# EAGLE board PIC32Circuit (EAGLE 7.5.0)
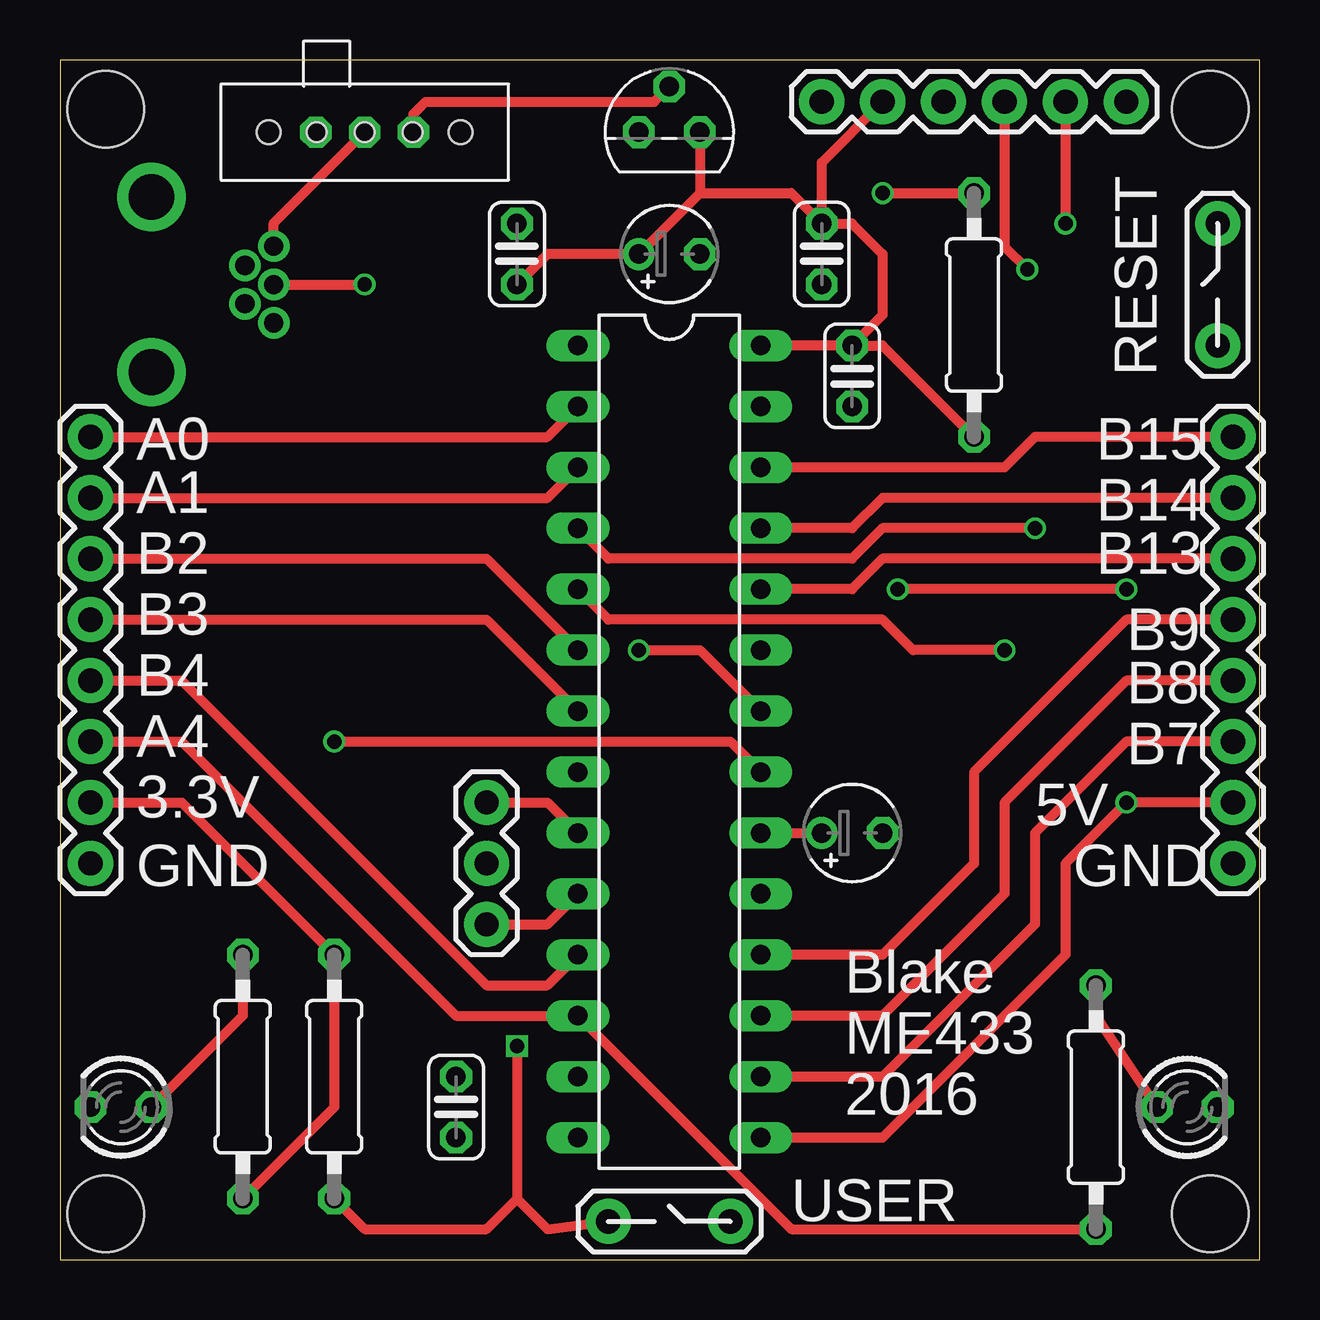
[diagram p0: board, top side]
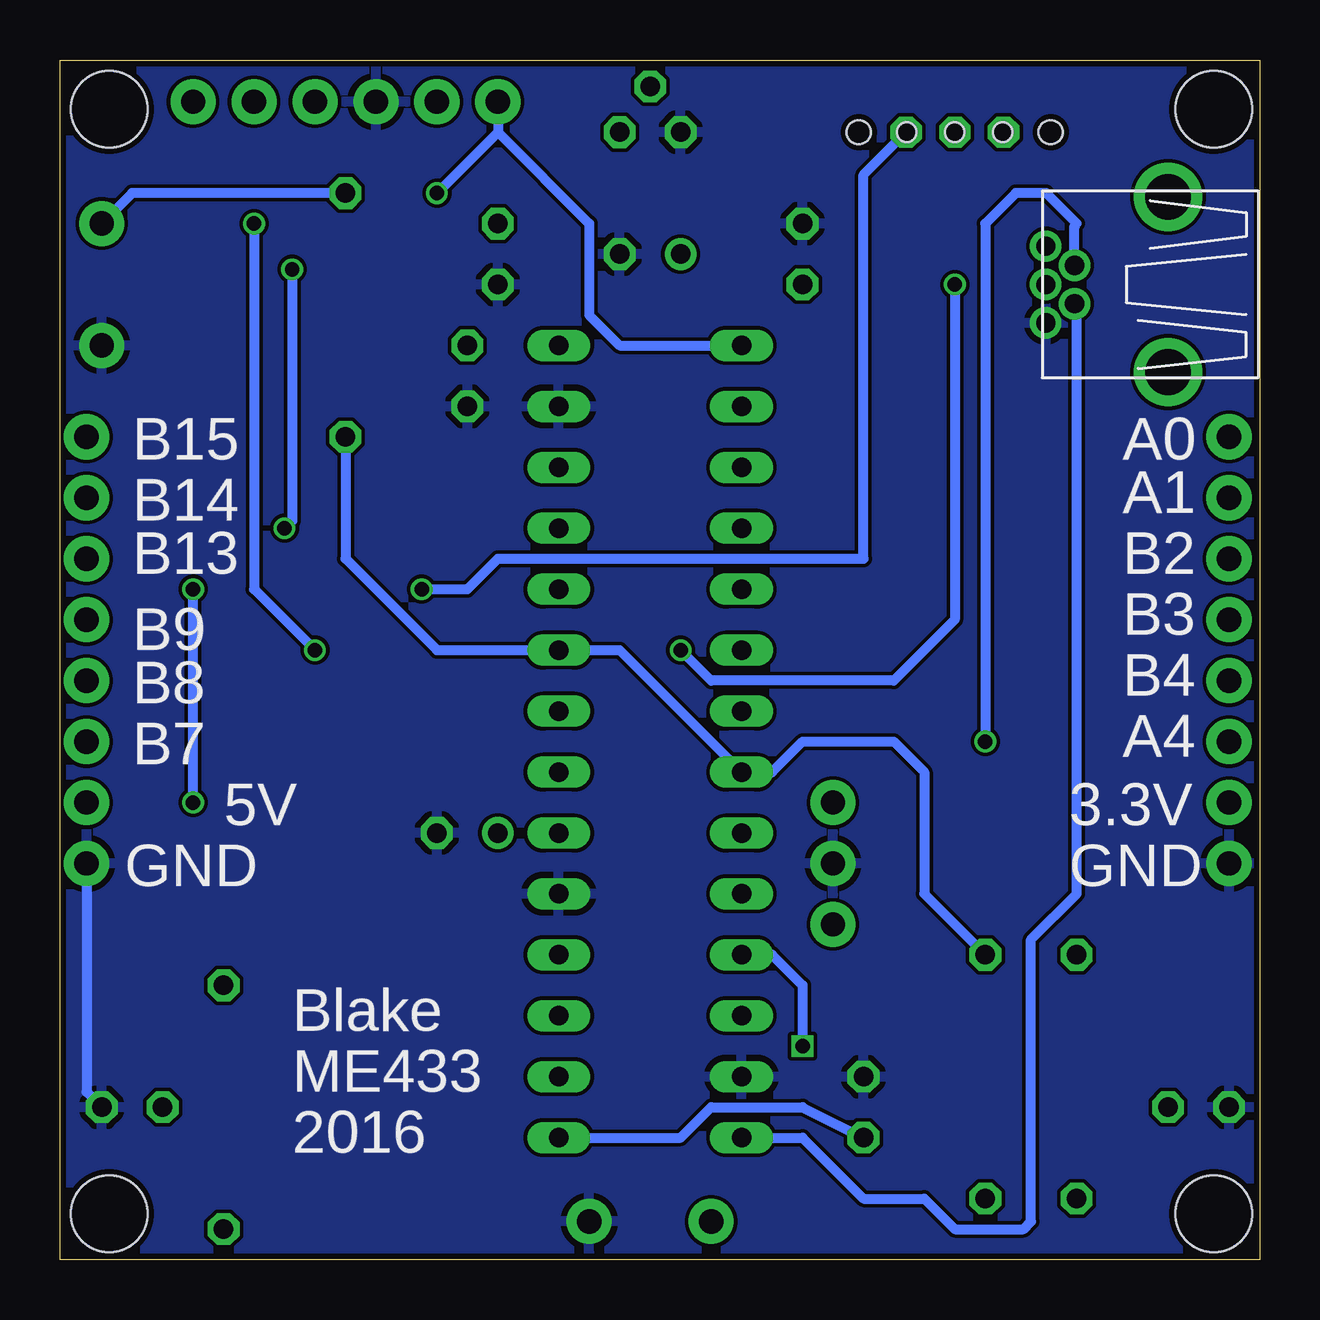
[diagram p1: board, bottom side, seen from below]

Size 50 x 50 mm. Coordinates in mm from the lower left corner, seen from the top.
Outline: 0,0 50,0 50,50 0,50 0,0
Copper layers (1*16): Top 0.035mm / dielectric 1.5mm / Bottom 0.035mm
Design rules "SeeedStudio_2layer_DRU_no_angle_20140221": minimum track width 6mil, minimum drill 12mil, track to track 6mil, track to pad 6mil, pad to pad 6mil, via to via 6mil, smd to smd 0mil, copper to edge 10mil, drill to drill 10mil, minimum pad ring 10mil, minimum via ring 6mil, stop-mask expansion 2mil, vias tented up to drill 100mil, thermal gap 10mil
Holes 3.2 mm at 1.91,47.94 47.94,47.94 47.94,1.91 1.91,1.91

## Footprints (pad centres in the part's own frame; a part is rotated, then mirrored left to right if it is on the bottom)
C025-024X044 = drill 0.813 octagon: 1 -1.27,0; 2 1.27,0
TT2D4 = drill 0.813: + -1.27,0 | drill 0.813 octagon: - 1.27,0
USB-MB-H = drill 0.8: D+ 5.1,0; D- 3.9,0.8; GND 5.1,-1.6; ID 3.9,-0.8; VBUS 5.1,1.6 | drill 1.9: P$6 0,-3.65; P$7 0,3.65
1X08_ROUND = drill 1.016 pad 1.88: 1 0,0; 2 2.54,0; 3 5.08,0; 4 7.62,0; 5 10.16,0; 6 12.7,0; 7 15.24,0; 8 17.78,0
LED3MM = drill 0.813 octagon: A -1.27,0; K 1.27,0
1X06 = drill 1.016 pad 1.88: 1 0,0; 2 2.54,0; 3 5.08,0; 4 7.62,0; 5 10.16,0; 6 12.7,0
0207/10 = drill 0.813 octagon: 1 -5.08,0; 2 5.08,0
1X03 = drill 1.016 pad 1.88: 1 0,0; 2 2.54,0; 3 5.08,0
PUSHBUTTON = drill 1.016 pad 1.88: 1 0,0; 3 5.08,0
DIL28-3 = drill 0.813 long: 1 -16.51,-3.81; 2 -13.97,-3.81; 3 -11.43,-3.81; 4 -8.89,-3.81; 5 -6.35,-3.81; 6 -3.81,-3.81; 7 -1.27,-3.81; 8 1.27,-3.81; 9 3.81,-3.81; 10 6.35,-3.81; 11 8.89,-3.81; 12 11.43,-3.81; 13 13.97,-3.81; 14 16.51,-3.81; 15 16.51,3.81; 16 13.97,3.81; 17 11.43,3.81; 18 8.89,3.81; 19 6.35,3.81; 20 3.81,3.81; 21 1.27,3.81; 22 -1.27,3.81; 23 -3.81,3.81; 24 -6.35,3.81; 25 -8.89,3.81; 26 -11.43,3.81; 27 -13.97,3.81; 28 -16.51,3.81
SLIDERSWITCH = drill 0.8 octagon: P$1 0,2.032; P$2 0,0; P$3 0,-2.032 | hole 0.8: 0,2; 0,-2; 0,0 | hole 1: 0,-4; 0,4
TO92 = drill 0.813 octagon: 1 -1.27,0; 2 0,1.905; 3 1.27,0

## Placement (x,y rotation side)
C1  0.1uF  [C025-024X044]  16.51,6.35 90 top
C2  0.1uF  [C025-024X044]  31.75,41.91 90 top
C3  0.1uF  [C025-024X044]  33.02,36.83 270 top
C4  0.1uF  [C025-024X044]  19.05,41.91 90 top
C5  10uF  [TT2D4]  25.4,41.91 0 top
C6  10uF  [TT2D4]  33.02,17.78 0 top
J1  USB-MB-H  [USB-MB-H]  3.81,40.64 0 top
J4  [1X08_ROUND]  48.9,34.29 270 top
J5  [1X08_ROUND]  1.27,34.29 270 top
LED1  [LED3MM]  2.54,6.35 180 top
LED3  [LED3MM]  46.99,6.35 0 top
PICKIT3  [1X06]  31.75,48.26 0 top
R1  10k  [0207/10]  38.1,39.37 90 top
R2  10k  [0207/10]  11.43,7.62 90 top
R4  330  [0207/10]  7.62,7.62 90 top
R5  330  [0207/10]  43.18,6.35 90 top
RES  8MHz  [1X03]  17.78,19.05 270 top
RESET  PUSHBUTTON  [PUSHBUTTON]  48.26,38.1 90 top
U$1  PIC32MX250F128B  [DIL28-3]  25.4,21.59 270 top
U$2  SLIDERSWITCH  [SLIDERSWITCH]  12.7,46.99 90 top
U$3  MCP1702  [TO92]  25.4,46.99 0 top
USER  PUSHBUTTON  [PUSHBUTTON]  22.86,1.59 0 top

## Library data of the parts
C1-C4 J1 RES RESET U$1-U$3 USER = PIC32
C5 C6 R1 R2 R4 R5 = resistor
J4 J5 PICKIT3 = PIC32; PROD_ID: CONN-08437
LED1 LED3 = led

## Nets
3V3: C2.2 C3.1 C4.1 C5.+ J5.7 PICKIT3.2 R1.1 R2.2 R4.1 U$1.8 U$1.23 U$1.28 U$3.3
5V: C1.1 J4.7 U$1.15 U$2.P$3 U$3.2
A0: J5.1 U$1.2
A1: J5.2 U$1.3
A4: J5.6 R5.1 U$1.12
B2: J5.3 U$1.6
B3: J5.4 U$1.7
B4: J5.5 R2.1 U$1.11 USER.1
B7: J4.6 U$1.16
B8: J4.5 U$1.17
B9: J4.4 U$1.18
B13: J4.3 U$1.24
B14: J4.2 U$1.25
B15: J4.1 U$1.26
D+: J1.D+ U$1.22
D-: J1.D- U$1.21
GND: C1.2 C2.1 C3.2 C4.2 C5.- C6.- J1.GND J4.8 J5.8 LED1.K LED3.K PICKIT3.3 RES.2 RESET.1 U$1.13 U$1.19 U$1.27 U$3.1 USER.3
ID: J1.ID U$1.14
MCLR: PICKIT3.1 R1.2 RESET.3 U$1.1
N$2: LED1.A R4.2
N$3: C6.+ U$1.20
N$4: J1.VBUS U$2.P$2
N$5: LED3.A R5.2
OSC1: RES.1 U$1.9
OSC2: RES.3 U$1.10
PGC: PICKIT3.5 U$1.5
PGD: PICKIT3.4 U$1.4

## Tracks (layer width: path | path; a pad name or v marks a point on that pad's centre or on a via)
3V3
  Top 0.406: U$3.3 26.67,44.45 | 26.67,44.45 C5.+ 20.32,41.91 C4.1 | 26.67,44.45 30.48,44.45 C2.2 | C2.2 31.75,45.72 PICKIT3.2 | C2.2 33.02,43.18 34.29,41.91 34.29,39.37 C3.1 | C3.1 U$1.28 | C3.1 34.29,38.1 R1.1 | R4.1 11.43,6.35 R2.2 5.08,19.05 J5.7
  Bottom 0.406: R1.1 38.1,29.21 34.29,25.4 U$1.23 26.67,25.4 U$1.8 20.32,20.32 19.05,21.59 15.24,21.59 13.97,20.32 13.97,15.24 R2.2
5V  (via drill 0.6)
  Top 0.406: U$2.P$3 14.73,47.75 15.24,48.26 24.77,48.26 U$3.2 | J4.7 v44.45,19.05 41.91,16.51 41.91,12.7 34.29,5.08 U$1.15 | v44.45,27.94 v34.92,27.94
  Bottom 0.406: U$1.15 24.13,5.08 22.86,6.35 19.05,6.35 C1.1 | v44.45,19.05 v44.45,27.94 | v34.92,27.94 33.02,27.94 31.75,29.21 16.51,29.21 16.51,45.21 U$2.P$3
A0
  Top 0.406: J5.1 20.32,34.29 U$1.2
A1
  Top 0.406: J5.2 20.32,31.75 U$1.3
A4
  Top 0.406: J5.6 5.08,21.59 16.51,10.16 U$1.12 30.48,1.27 R5.1
B2
  Top 0.406: J5.3 17.78,29.21 U$1.6
B3
  Top 0.406: J5.4 17.78,26.67 U$1.7
B4  (via drill 0.6)
  Top 0.406: R2.1 12.7,1.27 17.78,1.27 19.05,2.54 | v19.05,8.89 19.05,2.54 | 19.05,2.54 20.32,1.27 USER.1 | J5.5 5.08,24.13 17.78,11.43 20.32,11.43 U$1.11
  Bottom 0.406: U$1.11 20.32,12.7 19.05,11.43 v19.05,8.89
B7
  Top 0.406: J4.6 44.45,21.59 40.64,17.78 40.64,13.97 34.29,7.62 U$1.16
B8
  Top 0.406: J4.5 44.45,24.13 39.37,19.05 39.37,15.24 34.29,10.16 U$1.17
B9
  Top 0.406: J4.4 44.45,26.67 38.1,20.32 38.1,16.51 34.29,12.7 U$1.18
B13
  Top 0.406: J4.3 34.29,29.21 33.02,27.94 U$1.24
B14
  Top 0.406: J4.2 34.29,31.75 33.02,30.48 U$1.25
B15
  Top 0.406: J4.1 40.64,34.29 39.37,33.02 U$1.26
D+  (via drill 0.6)
  Top 0.406: J1.D+ v12.7,40.64 | v24.13,25.4 26.67,25.4 U$1.22
  Bottom 0.406: v12.7,40.64 12.7,26.67 15.24,24.13 22.86,24.13 v24.13,25.4
D-  (via drill 0.6)
  Top 0.406: v11.43,21.59 27.94,21.59 U$1.21
  Bottom 0.406: J1.D- 7.71,43.09 7.62,43.18 8.89,44.45 10.16,44.45 11.43,43.18 v11.43,21.59
GND
  Bottom 0.406: J4.8 48.9,6.99 LED3.K
  pour Bottom: 0,50.8 0,0 50.8,0 50.8,50.8
ID
  Bottom 0.406: U$1.14 19.05,5.08 16.51,2.54 13.97,2.54 12.7,1.27 9.84,1.27 9.53,1.59 9.53,13.34 7.62,15.24 7.62,39.75 J1.ID
MCLR  (via drill 0.6)
  Top 0.406: v34.29,44.45 R1.2
  Bottom 0.406: PICKIT3.1 31.75,46.99 | 31.75,46.99 27.94,43.18 27.94,39.37 26.67,38.1 U$1.1 | R1.2 46.99,44.45 RESET.3 | 31.75,46.99 v34.29,44.45
N$2
  Top 0.406: R4.2 7.62,10.16 LED1.A
N$3
  Top 0.406: U$1.20 C6.+
N$4
  Top 0.406: J1.VBUS 8.91,43.2 U$2.P$2
N$5
  Top 0.406: R5.2 43.18,10.16 LED3.A
OSC1
  Top 0.406: RES.1 20.32,19.05 U$1.9
OSC2
  Top 0.406: RES.3 20.32,13.97 U$1.10
PGC  (via drill 0.6)
  Top 0.406: PICKIT3.5 v41.91,43.18 | v39.37,25.4 35.56,25.4 34.29,26.67 22.86,26.67 U$1.5
  Bottom 0.406: v41.91,43.18 41.91,27.94 v39.37,25.4
PGD  (via drill 0.6)
  Top 0.406: PICKIT3.4 39.37,42.23 v40.32,41.27 | v40.64,30.48 34.29,30.48 33.02,29.21 22.86,29.21 U$1.4
  Bottom 0.406: v40.32,41.27 40.32,30.8 v40.64,30.48

## Text on the board
tPlace: RESET | A0 | B15 | A1 | B14 | B2 | B13 | B3 | B9 | B4 | B8 | A4 | B7 | 3.3V | 5V | GND | GND | Blake | ME433 | 2016 | USER
bPlace: A0 | B15 | A1 | B14 | B2 | B13 | B3 | B9 | B4 | B8 | A4 | B7 | 3.3V | 5V | GND | GND | Blake | ME433 | 2016